# Altium PCB Main.PcbDoc (part 1 of 2)
Units mm, origin at the board's own origin, x right, y up, seen from the top; angles counter-clockwise.
Board outline 184.78 x 184.78 mm, 2 copper layers (Top Layer, Bottom Layer); 86 components, 58 nets, 400 pads, 352 vias.
Unrouted connection lines stored in the file: 51.
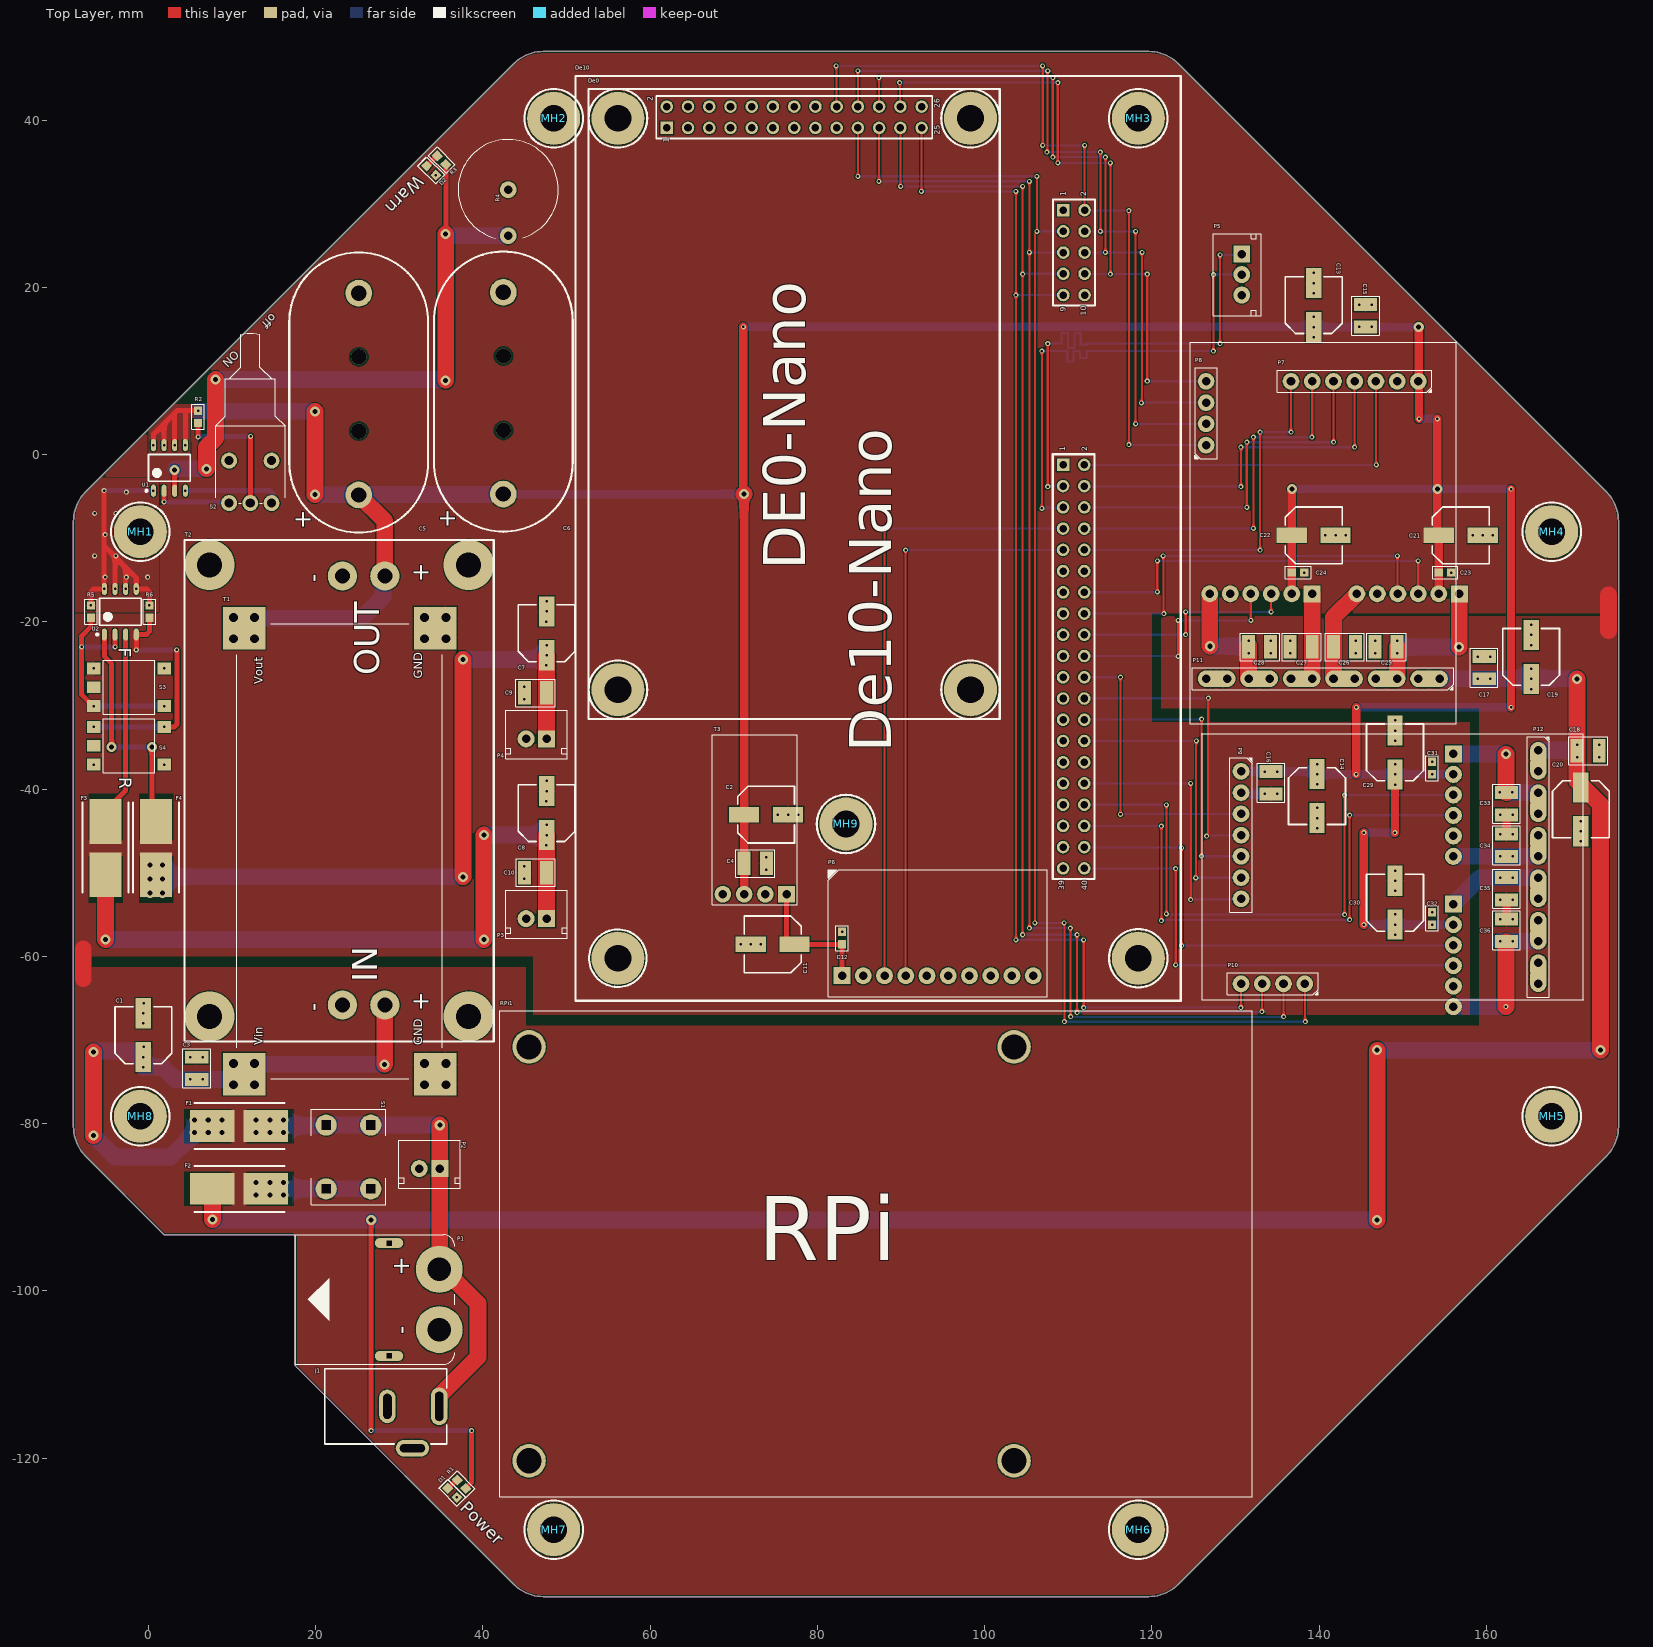
[diagram p0: Top Layer view]
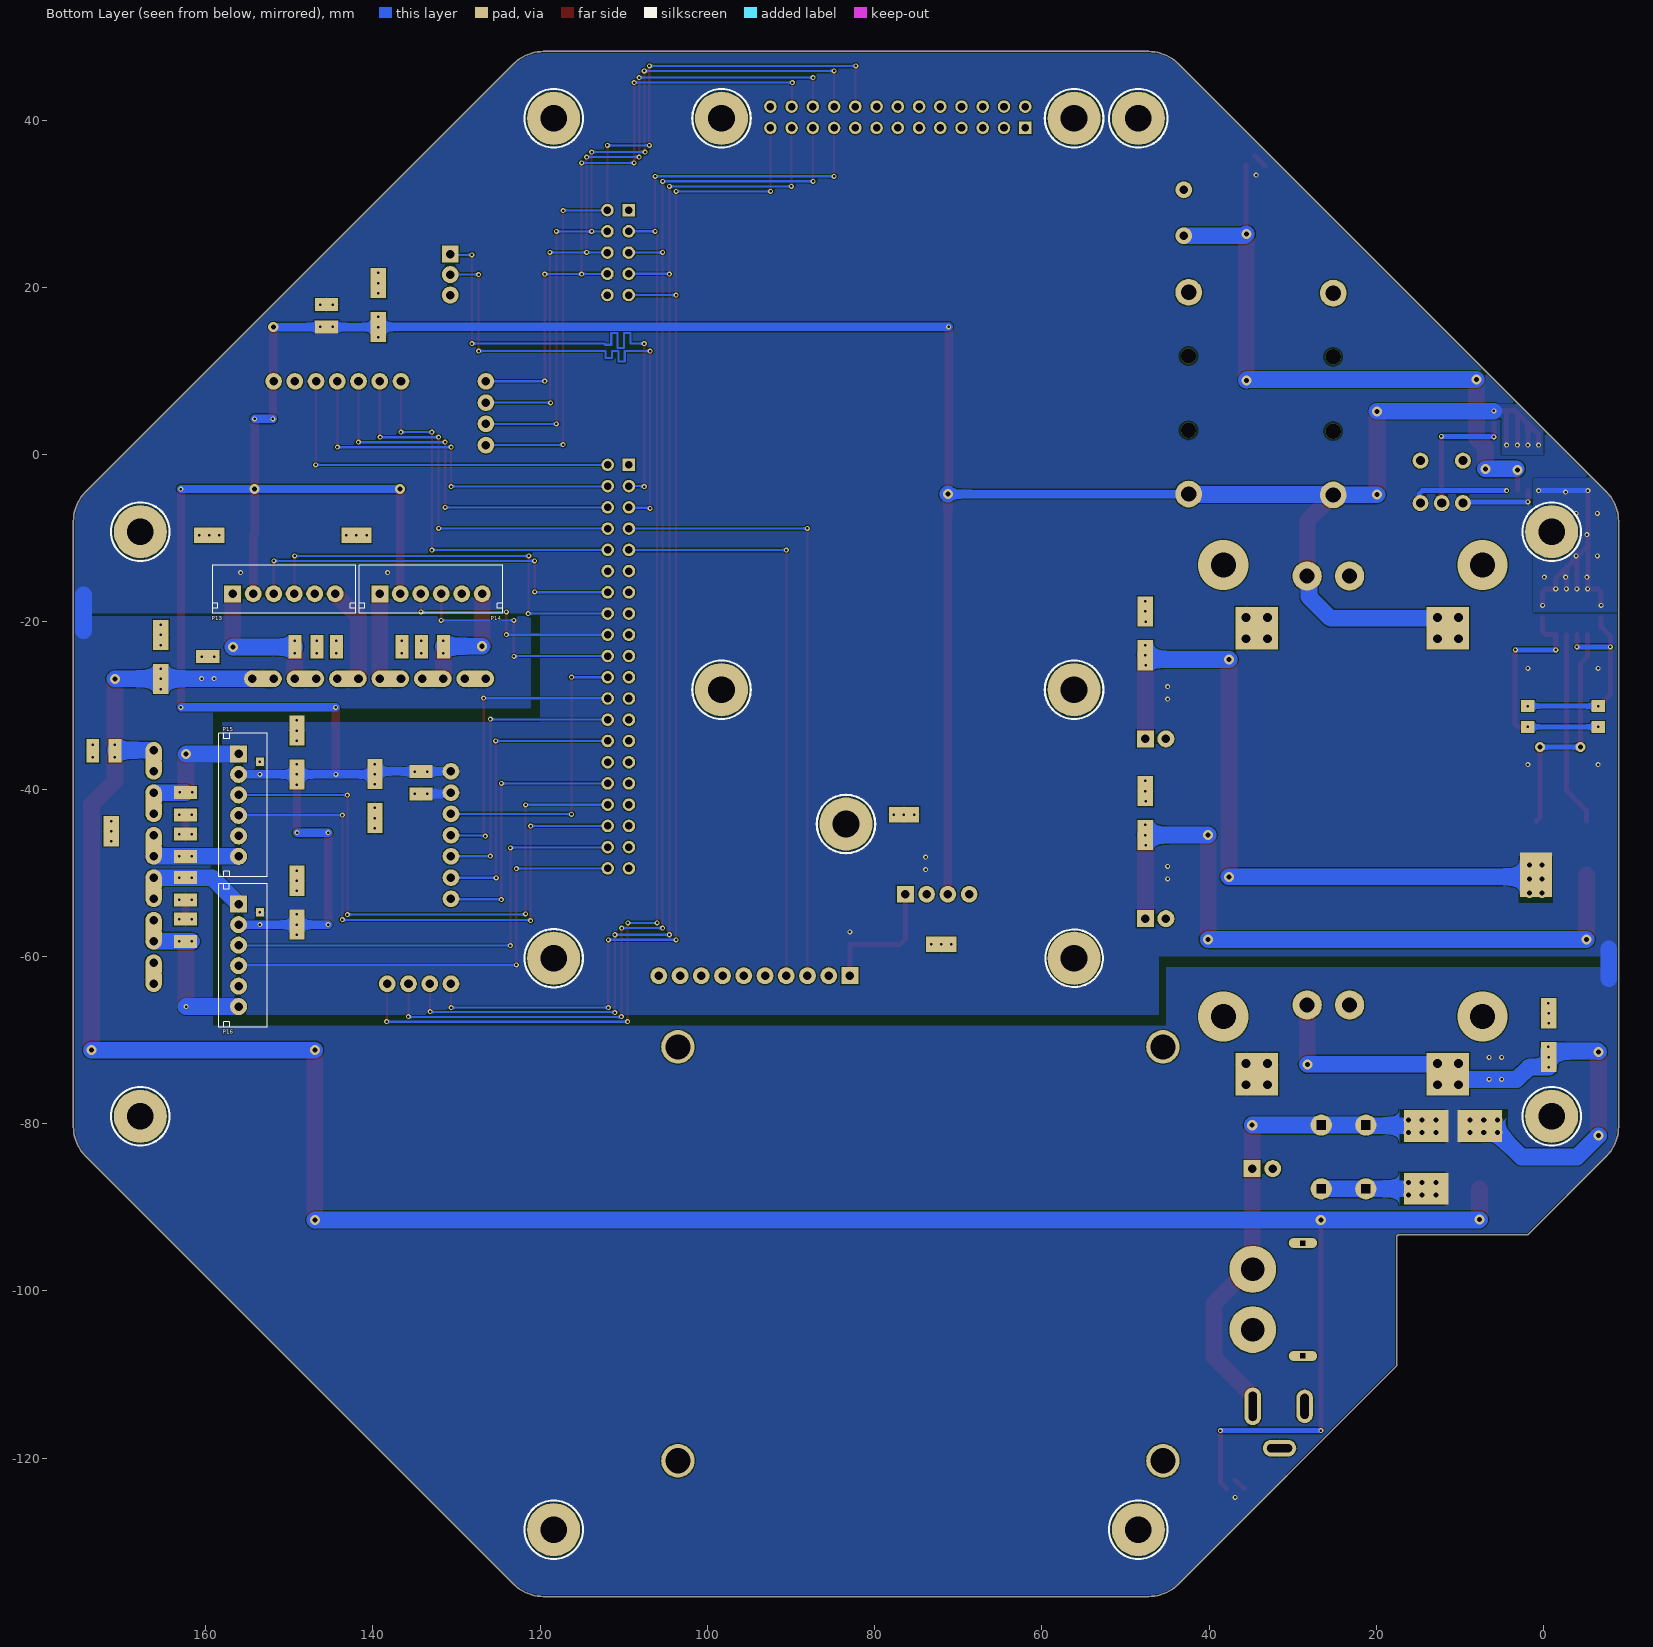
[diagram p1: Bottom Layer view, seen from below]
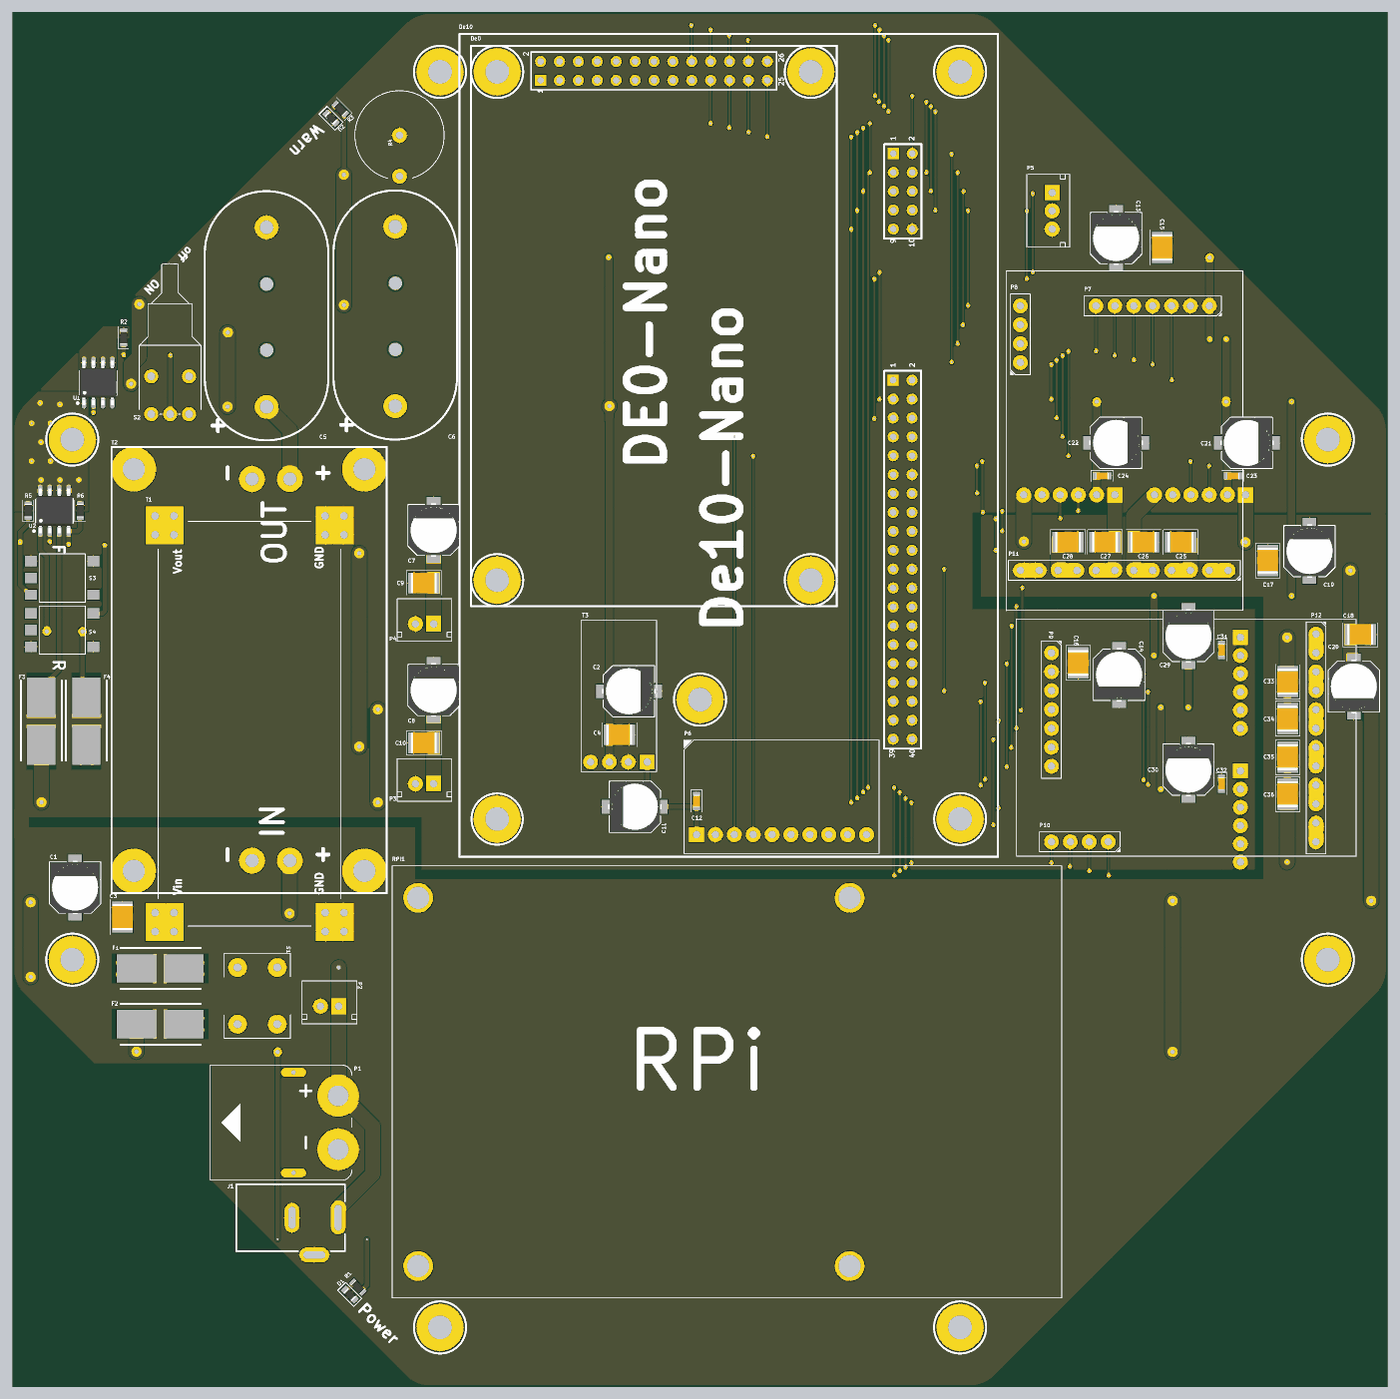
[diagram p2: 3D render of the assembled board from above, using the file's embedded part models]

## Layer stack, top to bottom
Top Solder: solder mask 0.0102, Solder Resist, Dk 3.5
Top Layer: signal copper 0.0356
Dielectric 1: dielectric 0.32, FR-4, Dk 4.8
Bottom Layer: signal copper 0.0356
Bottom Solder: solder mask 0.0102, Solder Resist, Dk 3.5

## Board outline
1.867,-93.289 17.242,-93.289 cw(c17.242,-93.614) 17.567,-93.614 17.567,-108.995 43.676,-135.104 ccw(c47.212,-131.569) 47.212,-136.569 119.607,-136.569 ccw(c119.607,-131.569) 123.142,-135.104 174.333,-83.914 ccw(c170.797,-80.378) 175.797,-80.378 175.797,-7.983 ccw(c170.797,-7.983) 174.333,-4.448 123.142,46.743 ccw(c119.607,43.207) 119.607,48.207 47.212,48.207 ccw(c47.212,43.207) 43.676,46.743 -7.514,-4.448 ccw(c-3.979,-7.983) -8.979,-7.983 -8.979,-80.378 ccw(c-3.979,-80.378) -7.514,-83.914

## Design rules (kind name [scope] priority, off if disabled: settings)
BoardOutlineClearance [All] p1: gap=0.2 ignorepadtopadclearanceinfootprint=FALSE
Clearance [All] p1: gap=0.127 ignorepadtopadclearanceinfootprint=FALSE except(0.25: Arc-Hole Track-Hole SMDPad-Hole THPad-Hole Via-Hole Fill-Hole Poly-Hole Region-Hole Text-Hole)
ComponentClearance [All] p1 off: gap=0.127 collisioncheckmode=3 verticalgap=0.127 showdistances=TRUE
DiffPairsRouting [All] p1: maxlimit=0.254 minlimit=0.127 mostfreqgap=0.127 toplayer_minwidth=0.127 toplayer_maxwidth=25.4 toplayer_prefwidth=0.127 bottomlayer_minwidth=0.127 bottomlayer_maxwidth=25.4 bottomlayer_prefwidth=0.127 maxuncoupledlength=12.7
Height [All] p1: minheight=0 maxheight=1816.048 prefheight=12.7
HoleSize [All] p1: absolutevalues=TRUE maxlimit=6.3 minlimit=0.3 maxpercent=80.000 minpercent=20.000
HoleToHoleClearance [All] p1: gap=0.25 allowstackedmicrovias=FALSE
Length "Schematic Length Constraint" [InNet('UART_RX')] p1: maxlimit=61 minlimit=60
Length [InNetClass('UART')] p2: maxlimit=60.1 minlimit=60
MinimumAnnularRing [All] p1: minimumring=0.076
MinimumSolderMaskSliver [All] p1: minsoldermaskwidth=0
PlaneClearance [All] p1: clearance=0.127
PlaneConnect PlaneConnectPowerPads [InPadClass('PowerPads')] p1: planeconnectstyle=Direct reliefexpansion=0.508 reliefentries=4 reliefconductorwidth=0.254 reliefairgap=0.254
PlaneConnect [All] p2: pad.planeconnectstyle=Relief pad.reliefexpansion=0.3 pad.reliefentries=4 pad.reliefconductorwidth=0.127 pad.reliefairgap=0.127 via.planeconnectstyle=Direct via.reliefexpansion=0.3 via.reliefentries=4 via.reliefconductorwidth=0.127 via.reliefairgap=0.127
PolygonConnect PolygonConnectPowerPads [All vs (InPadClass('PowerPads'))] p1: connectstyle=Direct reliefconductorwidth=0.254 reliefentries=4 polygonreliefangle="90 Angle" airgapwidth=0.254
PolygonConnect [All] p2: thpad.connectstyle=Relief thpad.reliefconductorwidth=0.127 thpad.reliefentries=4 thpad.polygonreliefangle="90 Angle" thpad.airgapwidth=0.127 smdpad.connectstyle=Relief smdpad.reliefconductorwidth=0.127 smdpad.reliefentries=4 smdpad.polygonreliefangle="90 Angle" smdpad.airgapwidth=0.127 via.connectstyle=Direct via.reliefconductorwidth=0.127 via.reliefentries=4 via.polygonreliefangle="90 Angle" via.airgapwidth=0.127
RoutingVias [All] p1: holewidth=0.3 width=0.6 viastyle="Through Hole" minholewidth=0.3 minwidth=0.6 maxholewidth=0.6 maxwidth=6.6
SilkToSilkClearance [All] p1: silktosilkclearance=0
SilkToSolderMaskClearance [IsPad] p1 off: minsilkscreentomaskgap=0.127 clearancetoexposedcopper=TRUE
SolderMaskExpansion [All] p1: expansion=0.075 istentingtop=FALSE
Width [All] p1: maxlimit=25.4 minlimit=0.127 preferedwidth=0.127 minimp=50.000000 maximp=50.000000 favimp=50.000000
20 further rules are at their usual default settings.

## Classes and differential pairs
net class UART: UART_RX UART_TX
component class Power: C1 C2 C3 C4 C5 C6 C7 C8 C9 C10 D1 D2 F1 F2 F3 F4 J1 MH1 MH2 MH3 MH4 MH5 MH6 MH7 MH8 MH9 P1 P2 P3 P4 R1 R2 R3 R4 R5 R6 S1 S2 S3 S4 T1 T2 T3 U1 U2
component class Motor: C13 C14 C15 C16 C17 C18 C19 C20 C21 C22 C23 C24 C25 C26 C27 C28 C29 C30 C31 C32 C33 C34 C35 C36 P7 P8 P9 P10 P11 P12 P13 P14 P15 P16
component class IOandCommunication: C11 C12 De0 De10 P5 P6 RPi1

## Components (designator, comment, footprint, x,y, rotation, side; value= is the part's Value field where it differs from the comment)
C1 "220uF" VZT221M1ETR-0607 -0.603,-69.434 r90 top
C2 "220uF" VZT221M1ETR-0607 73.85,-43.05 r0 top
C3 "0.1uF" 1210B104K500NT 5.765,-73.4 r270 top
C4 "0.1uF" 1210B104K500NT 72.55,-48.892 r180 top
C5 "10F" SUPPYCAP-DIP_L33.0_W16.5 25.135,-1.025 r90 top
C6 "10F" SUPPYCAP-DIP_L33.0_W16.5 42.435,-0.925 r90 top
C7 "220uF" VZT221M1ETR-0607 47.6,-21.375 r90 top
C8 "220uF" VZT221M1ETR-0607 47.6,-42.875 r90 top
C9 "0.1uF" 1210B104K500NT 46.275,-28.5 r0 top
C10 "0.1uF" 1210B104K500NT 46.275,-50 r0 top
C11 "220uF" VZT221M1ETR-0607 74.64,-58.575 r180 top
C12 "0.1uF" CL10B104KA8NNNC 82.935,-57.825 r270 top
C13 "220uF" VZT221M1ETR-0607 139.335,17.875 r90 top
C14 "220uF" VZT221M1ETR-0607 139.735,-40.85 r270 top
C15 "0.1uF" 1210B104K500NT 145.535,16.6 r270 top
C16 "0.1uF" 1210B104K500NT 134.235,-39.25 r90 top
C17 "0.1uF" 1210B104K500NT 159.715,-25.485 r270 top
C18 "0.1uF" 1210B104K500NT 172.16,-35.425 r180 top
C19 "220uF" VZT221M1ETR-0607 165.335,-24.2 r90 top
C20 "220uF" VZT221M1ETR-0607 171.287,-42.423 r270 top
C21 "220uF" VZT221M1ETR-0607 156.924,-9.665 r0 top
C22 "220uF" VZT221M1ETR-0607 139.34,-9.665 r0 top
C23 "0.1uF" CL10B104KA8NNNC 155.049,-14.11 r180 top
C24 "0.1uF" CL10B104KA8NNNC 137.465,-14.11 r180 top
C25 "0.1uF" 1210B104K500NT 148,-23 r180 top
C26 "0.1uF" 1210B104K500NT 143.03,-23 r180 top
C27 "0.1uF" 1210B104K500NT 137.84,-23 r180 top
C28 "0.1uF" 1210B104K500NT 132.87,-23 r180 top
C29 "220uF" VZT221M1ETR-0607 149.062,-35.628 r90 top
C30 "220uF" VZT221M1ETR-0607 149.062,-53.593 r90 top
C31 "0.1uF" CL10B104KA8NNNC 153.507,-37.503 r270 top
C32 "0.1uF" CL10B104KA8NNNC 153.507,-55.468 r270 top
C33 "0.1uF" 1210B104K500NT 162.397,-41.758 r270 top
C34 "0.1uF" 1210B104K500NT 162.397,-46.728 r270 top
C35 "0.1uF" 1210B104K500NT 162.397,-51.918 r270 top
C36 "0.1uF" 1210B104K500NT 162.397,-56.888 r270 top
D1 "LED(G)" BL-HG036D-AV-TRB 35.802,-122.572 r315 top
D2 "LED(G)" BL-HG036D-AV-TRB 33.278,35.559 r315 top
De0 "DE0-Nano" DE0-NANO 93.726,40.334 r90 top locked
De10 "De10-Nano" DE10-NANO 110.664,19.077 r90 top locked
F1 "5A Fuse Holder" "SMD FUSES HOLDER" 10.827,-80.314 r180 top
F2 "10A Fuse Holder" "SMD FUSES HOLDER" 10.827,-87.807 r180 top
F3 "4A Fuse Holder" "SMD FUSES HOLDER" -5.135,-47.075 r270 top
F4 "4A Fuse Holder" "SMD FUSES HOLDER" 0.915,-47.075 r270 top
J1 "DC-005-T25" DC-005-T25 26.66,-114.73 r0 top
MH1 "M3 Hole" "M3 HOLE" -0.979,-9.226 r0 top locked
MH2 "M3 Hole" "M3 HOLE" 48.455,40.207 r0 top
MH3 "M3 Hole" "M3 HOLE" 118.364,40.207 r0 top
MH4 "M3 Hole" "M3 HOLE" 167.797,-9.226 r0 top
MH5 "M3 Hole" "M3 HOLE" 167.797,-79.135 r0 top
MH6 "M3 Hole" "M3 HOLE" 118.364,-128.569 r0 top
MH7 "M3 Hole" "M3 HOLE" 48.455,-128.569 r0 top
MH8 "M3 Hole" "M3 HOLE" -0.979,-79.135 r0 top
MH9 "M3 Hole" "M3 HOLE" 83.409,-44.181 r0 top
P1 "Header 2" XT60PW-F 31.767,-101.039 r90 top
P2 "Header 2" B2B-XH-A(LF)(SN) 37.28,-81.994 r180 top
P3 "Header 2" B2B-XH-A(LF)(SN) 50.05,-52.1 r180 top
P4 "Header 2" B2B-XH-A(LF)(SN) 50.05,-30.6 r180 top
P5 "Header 3" B3B-XH-A(LF)(SN) 131.61,25.075 r270 top
P6 "MPU9250" MPU9250 81.265,-49.625 r90 top
P7 "Header 7" KH-2.54FH-1X7P-H8.5 132.465,8.75 r180 top
P8 "Header 4" KH-2.54FH-1X4P-H8.5 126.465,10.37 r90 top
P9 "Header 7" KH-2.54FH-1X7P-H8.5 130.647,-57.293 r270 top
P10 "Header 4" KH-2.54FH-1X4P-H8.5 129.027,-63.293 r180 top
P11 "Header 12" "KH-2.54FH-1X12P-H8.5 (PAD LINKED)" 154.405,-26.81 r180 top
P12 "Header 12" "KH-2.54FH-1X12P-H8.5 (PAD LINKED)" 166.207,-35.353 r270 top
P13 "Header 6" B6B-XH-A(LF)(SN) 156.749,-16.65 r180 bottom
P14 "Header 6" B6B-XH-A(LF)(SN) 139.165,-16.65 r180 bottom
P15 "Header 6" B6B-XH-A(LF)(SN) 156.047,-35.803 r270 bottom
P16 "Header 6" B6B-XH-A(LF)(SN) 156.047,-53.768 r270 bottom
R1 "150k" RS-03K1503FT 37.428,-123.138 r315 top
R2 "1k" RS-03K1503FT 5.935,4.5 r90 top
R3 "150k" RS-03K1503FT 35.045,35.205 r315 top
R4 "12" MOF3WS-12Ω±5%T 43.015,31.675 r270 top
R5 "1k" RS-03K1503FT -6.9,-18.775 r90 top
R6 "1k" RS-03K1503FT 0.1,-18.775 r90 top
RPi1 "Rasbperry PI 4" "RASPBERRY PI 4" 74.515,-95.575 r180 top locked
S1 "Motor EMS" JNQ032 26.575,-87.807 r270 top
S2 "Digital EMS" ST-0-102-C03-N003-RS 12.175,9.045 r270 top
S3 "FPGA_Re" SKHMQLE010 -2.335,-27.825 r180 top
S4 "RPi_Re" SKHMQKE010 -2.335,-34.825 r180 top
T1 "XL4015 Module" "XL4015 VOLTAGE REGULATOR MODULE" 12.695,-72.825 r90 top locked
T2 "XL4016 Module" "XH-M401 VOLTAGE REGULATOR MODULE" 26.365,9.375 r90 top locked
T3 "3P3 Voltage regulator" "SMALL VOLTAGE REGULATOR MODULE" 77.575,-53.845 r180 top
U1 "HSM3214" HSM3214 2.5,-1.6 r90 top
U2 "HSM3214" HSM3214 -3.37,-18.8 r90 top

## Footprints (in the part's own frame and the unit in brackets; to place one, negate y for a bottom-side part, rotate by r counter-clockwise, add the part's x,y. Pads: shape width x height; smd on the part's side, far side on the other; paste and mask are expansions set on the pad)
1210B104K500NT [mm] "50V 100nF X7R ±10% 1210  Multilayer Ceramic Capacitors MLCC - SMD/SMT ROHS"
  rect 1.55x2.8 smd: 1(-1.325,0) 2(1.325,0)
  silkscreen extent -2.35,-1.65 2.35,1.65, body extent -1.75,-1.4 1.75,1.4, height 2.8
B2B-XH-A(LF)(SN) [mil] "1x2P XH Header, Top Vesion"
  rect 80x80 hole 40: 1(96.46,133.86)
  round 80 hole 40: 2(192.91,133.86)
  silkscreen extent 0,0 289,226
B3B-XH-A(LF)(SN) [mil] "1x3P XH Header, Top Vesion"
  rect 80x80 hole 40: 1(43.31,-34.45)
  round 80 hole 40: 2(139.76,-34.45) 3(236.22,-34.45)
  silkscreen extent -53,-168 333,58
B6B-XH-A(LF)(SN) [mil] "1x6P XH 1 2.5mm 6 Brass Plugin,P=2.5mm  Wire To Board / Wire To Wire Connector ROHS"
  rect 80x80 hole 40: 1(0,0)
  round 80 hole 40: 2(96.46,0) 3(192.91,0) 4(289.37,0) 5(385.83,0) 6(482.28,0)
  silkscreen extent -96,-93 579,134
BL-HG036D-AV-TRB [mm] "0603 SMD LED(G)"
  rect 0.95x0.95 smd: 1(0.725,-0.75) 2(2.275,-0.75)
  silkscreen extent -0.06,-1.5 3,0, body extent 0.65,-1.2 2.35,-0.3, height 0.9
CL10B104KA8NNNC [mm] "0603 25V 100nF MLCC"
  rect 1x0.95 smd: 1(-0.75,0) 2(0.75,0)
  silkscreen extent -1.5,-0.75 1.5,0.75, body extent -0.85,-0.45 0.85,0.45, height 0.55
DC-005-T25 [mm] "30V 3A 2.5mm Power Connector"
  oval 2x4.5 hole 1 slot 3.5 at 90 deg: 1(8.105,0.905)
  oval 2x4 hole 1 slot 3 at 90 deg: 2(1.905,0.905)
  oval 4x2 hole 1 slot 3 at 0 deg: 3(4.905,-4.095)
  silkscreen extent -5.6,-3.6 9.01,5.41
DE0-NANO [mm]
  round 6.35 hole 3.2: 0(-68.453,-4.572) 0(-68.453,37.592) 0(-0.127,-4.572) 0(-0.127,37.592)
  rect 1.5x1.5 hole 0.9: 1(-1.27,31.75)
  round 1.5 hole 0.9: 2(1.27,31.75) 3(-1.27,29.21) 4(1.27,29.21) 5(-1.27,26.67) 6(1.27,26.67) 7(-1.27,24.13) 8(1.27,24.13) 9(-1.27,21.59) 10(1.27,21.59) 11(-1.27,19.05) 12(1.27,19.05) 13(-1.27,16.51) 14(1.27,16.51) 15(-1.27,13.97) 16(1.27,13.97) 17(-1.27,11.43) 18(1.27,11.43) 19(-1.27,8.89) 20(1.27,8.89) 21(-1.27,6.35) 22(1.27,6.35) 23(-1.27,3.81) 24(1.27,3.81) 25(-1.27,1.27) 26(1.27,1.27)
  silkscreen extent -71.96,-8.08 3.38,41.1
DE10-NANO [mm]
  round 6.35 hole 3.2: 0(-79.31,-7.7) 0(-79.31,54.53) 0(21.13,54.53) 0(21.13,-7.7)
  rect 1.5x1.5 hole 0.9: 1(10.16,1.27) 11(-20.31,1.3)
  round 1.5 hole 0.9: 2(10.16,-1.27) 3(7.62,1.27) 4(7.62,-1.27) 5(5.08,1.27) 6(5.08,-1.27) 7(2.54,1.27) 8(2.54,-1.27) 9(0,1.27) 10(0,-1.27) 12(-20.31,-1.24) 13(-22.85,1.3) 14(-22.85,-1.24) 15(-25.39,1.3) 16(-25.39,-1.24) 17(-27.93,1.3) 18(-27.93,-1.24) 19(-30.47,1.3) 20(-30.47,-1.24) 21(-33.01,1.3) 22(-33.01,-1.24) 23(-35.55,1.3) 24(-35.55,-1.24) 25(-38.09,1.3) 26(-38.09,-1.24) 27(-40.63,1.3) 28(-40.63,-1.24) 29(-43.17,1.3) 30(-43.17,-1.24) 31(-45.71,1.3) 32(-45.71,-1.24) 33(-48.25,1.3) 34(-48.25,-1.24) 35(-50.79,1.3) 36(-50.79,-1.24) 37(-53.33,1.3) 38(-53.33,-1.24) 39(-55.87,1.3) 40(-55.87,-1.24) 41(-58.41,1.3) 42(-58.41,-1.24) 43(-60.95,1.3) 44(-60.95,-1.24) 45(-63.49,1.3) 46(-63.49,-1.24) 47(-66.03,1.3) 48(-66.03,-1.24) 49(-68.57,1.3) 50(-68.57,-1.24)
  silkscreen extent -84.39,-12.78 26.21,59.61
HSM3214 [mm] "30V 10A 12mΩ@10V,8A 1.5W 2.5V@250μA 2 N-Channel SOP-8  MOSFETs ROHS"
  oval 1.45x0.6 smd: 1(-2.725,1.905) 2(-2.725,0.635) 3(-2.725,-0.635) 4(-2.725,-1.905) 5(2.725,-1.905) 6(2.725,-0.635) 7(2.725,0.635) 8(2.725,1.905)
  silkscreen extent -2.85,-2.5 1.6,2.88, body extent -3,-2.5 3,2.5, height 1.75
JNQ032 [mm] "30A 4.8mm Short Connection"
  round 2.54 hole 1.1 square: 1(-7.62,0) 1(-7.62,-5.334) 2(0,0) 2(0,-5.334)
  silkscreen extent -9.53,-7.11 1.91,1.78, body extent -9.14,-6.86 1.52,1.52, height 8.8
KH-2.54FH-1X4P-H8.5 [mm] "1x4P Female Headers"
  round 2 hole 1.02: 1(-9.24,0) 2(-6.7,0) 3(-4.16,0) 4(-1.62,0)
  silkscreen extent -10.86,-1.33 0,1.33, body extent -10.89,-1.34 0,1.32, height 8.65
KH-2.54FH-1X7P-H8.5 [mm] "1x7P Female Headers"
  round 2 hole 1.02: 1(-19.4,0) 2(-16.86,0) 3(-14.32,0) 4(-11.78,0) 5(-9.24,0) 6(-6.7,0) 7(-4.16,0)
  silkscreen extent -21.02,-1.33 -2.54,1.33, body extent -21.05,-1.34 -2.54,1.32, height 8.65
"KH-2.54FH-1X12P-H8.5 (PAD LINKED)" [mm] "Two Pad Linked, 1x12P Female Headers"
  oval 3x2 hole 1.02 copper offset 0.51,0: 1(0,0) 3(5.08,0) 5(10.16,0) 7(15.24,0) 9(20.32,0) 11(25.4,0)
  oval 3x2 hole 1.02 copper offset -0.51,0: 2(2.54,0) 4(7.62,0) 6(12.7,0) 8(17.78,0) 10(22.86,0) 12(27.94,0)
  silkscreen extent -1.62,-1.33 29.56,1.33, body extent -1.65,-1.34 29.56,1.33, height 8.65
"M3 HOLE" [mm] "M3 Hole"
  round 6.35 hole 3.2: 1(0,0)
  silkscreen extent -3.5,-3.5 3.5,3.5
MOF3WS-12Ω±5%T [mm] "12Ω 3W Resistor"
  round 2 hole 1: 1(0,0) 2(5.5,0)
  silkscreen extent -6,-6 5.79,6
MPU9250 [mil] "MPU9250"
  rect 80x80 hole 40: 1(-500,-65.75)
  round 80 hole 40: 2(-500,-165.75) 3(-500,-265.75) 4(-500,-365.75) 5(-500,-465.75) 6(-500,-565.75) 7(-500,-665.75) 8(-500,-765.75) 9(-500,-865.75) 10(-500,-965.75)
  silkscreen extent -600,-1031 0,0, body extent -560,-1031 -440,0, height 358
"RASPBERRY PI 4" [mm]
  round 4 hole 3: 1(-29,24.75) 1(-29,-24.75) 1(29,24.75) 1(29,-24.75)
  silkscreen extent -57.5,-29.05 32.5,29.05
RS-03K1503FT [mm] "0603 150k 1/10w Resistor"
  rect 1x0.95 smd: 1(-0.725,0) 2(0.725,0)
  silkscreen extent -1.5,-0.75 1.5,0.75, body extent -0.87,-0.47 0.87,0.47, height 0.5
SKHMQKE010 [mm] "6.2mm 3.1mm Round Button 50mA Brick nogging 6.5mm SPST 12V SMD  Tactile Switches ROHS"
  rect 1.6x1.4 smd: 1(-4.2,2.25) 1(4.2,2.25) 2(-4.2,-2.25) 2(4.2,-2.25) 3(4.2,0)
  silkscreen extent -3.1,-3.25 3.1,3.25, body extent -3.1,-3.25 3.1,3.25, height 3.1
SKHMQLE010 [mm] "6.2mm 3.1mm Round Button 50mA Brick nogging 6.5mm SPST 12V SMD  Tactile Switches ROHS"
  rect 1.6x1.4 smd: 1(-4.2,2.25) 1(4.2,2.25) 2(-4.2,-2.25) 2(4.2,-2.25) 3(4.2,0)
  silkscreen extent -3.1,-3.25 3.1,3.25, body extent -3.1,-3.25 3.1,3.25, height 3.1
"SMALL VOLTAGE REGULATOR MODULE" [mm] "3A DC-DC Non-isolated voltage regulator module"
  round 2 hole 1.02: 1(6.35,-1.27) 2(3.81,-1.27) 4(8.89,-1.27)
  rect 2x2 hole 1.02: 3(1.27,-1.27)
  silkscreen extent 0,-20.32 10.16,0, body extent -0.35,-2.61 10.51,0.04, height 8.65
"SMD FUSES HOLDER" [mil] "SMD 1808 Fuse Holder"
  rect 210x150 smd: 1(-125.5,0) 2(125.5,0)
  silkscreen extent -214,-108 209,108, body extent -214,-108 209,108, height 150
ST-0-102-C03-N003-RS [mm] "SW-SPST"
  round 1.9 hole 1.1: 1(14.85,2.54) 2(14.85,0) 3(14.85,-2.54) 4(9.77,-2.54) 4(9.77,2.54)
  silkscreen extent -5.4,-4.15 14.85,4.15
SUPPYCAP-DIP_L33.0_W16.5 [mm] "478-11288-ND * 2"
  round 3.2 hole 1.83: 1(-3.802,0) 2(20.328,0)
  silkscreen extent -8.3,-8.3 25.2,8.3
VZT221M1ETR-0607 [mm] "SMD 6.3x7.7mm 220uF 25V Capacitor"
  rect 3.6x1.85 smd: 1(-2.625,0) 2(2.625,0)
  silkscreen extent -3.4,-3.4 3.4,3.4, body extent -3.6,-3.4 3.6,3.4, height 8
"XH-M401 VOLTAGE REGULATOR MODULE" [mm] "8A DC-DC Non-isolated voltage regulator module"
  round 3.5 hole 1.8: 1(-75.2,-1.9) 2(-75.2,3.18) 3(-23.9,-1.9) 4(-23.9,3.18)
  silkscreen extent -79.58,-14.92 -19.58,22.08
"XL4015 VOLTAGE REGULATOR MODULE" [mm] "5A DC-DC Non-isolated voltage regulator module"
  rect 2.74x2.74 hole 1.06 copper offset 0.1,0.1: 1(-2.54,0) 2(-2.54,-22.86) 3(50.8,0) 4(50.8,-22.86)
  rect 2.74x2.74 hole 1.06 copper offset 0.1,-0.1: 1(-2.54,2.54) 2(-2.54,-20.32) 3(50.8,2.54) 4(50.8,-20.32)
  rect 2.74x2.74 hole 1.06 copper offset -0.1,-0.1: 1(0,2.54) 2(0,-20.32) 3(53.34,2.54) 4(53.34,-20.32)
  rect 2.74x2.74 hole 1.06 copper offset -0.1,0.1: 1(0,0) 2(0,-22.86) 3(53.34,0) 4(53.34,-22.86)
  silkscreen extent -1.8,-22.46 52.6,2.14, body extent -3.81,-24.13 54.61,3.81, height 8.8
XT60PW-F [mm] "500V 45A XT Connector"
  round 5.6 hole 2.8: 1(3.6,-3) 2(-3.6,-3)
  oval 1.2x3.4 hole 0.6 square: 3(-6.75,3) 3(6.75,3)
  silkscreen extent -7.75,-4.85 7.75,14.2, body extent -7.75,-4.85 7.75,14.2, height 8.4

## Part data
C1 C2 C7 C8 C11 C13 C14 C19 C20 C21 C22 C29 C30: library part "Cap Pol1", "-45℃~+105℃ 2000hrs@105℃ 220uF 7.7mm 25V 6.3mm ±20% SMD,6.3x7.7mm  Aluminum Electrolytic Capacitors - SMD ROHS", LatestRevisionDate=17-Jul-2002, LatestRevisionNote="Re-released for DXP Platform.", PackageDescription="Polarized Capacitor (Radial); 2 Leads", PackageReference=RB7.6-15, Published=8-Jun-2000, Publisher="Altium Limited"
C3 C4 C9 C10 C15 C16 C17 C18 C25 C26 C27 C28 C33 C34 C35 C36: library part "Cap Semi", "50V 100nF X7R ±10% 1210  Multilayer Ceramic Capacitors MLCC - SMD/SMT ROHS", LatestRevisionDate=29-May-2009, LatestRevisionNote="IPC-7351 Footprint Added.", PackageDescription="Chip Capacitor", PackageReference=C1206, Published=8-Jun-2000, Publisher="Altium Limited"
C5 C6: library part "Cap Pol1", "CAPACITOR 10F -10% +30% 5.5V T/H", LatestRevisionDate=17-Jul-2002, LatestRevisionNote="Re-released for DXP Platform.", PackageDescription="Polarized Capacitor (Radial); 2 Leads", PackageReference=RB7.6-15, Published=8-Jun-2000, Publisher="Altium Limited"
C12 C23 C24 C31 C32: library part "Cap Semi", "25V 100nF X7R ±10% 0603  Multilayer Ceramic Capacitors MLCC - SMD/SMT ROHS", LatestRevisionDate=29-May-2009, LatestRevisionNote="IPC-7351 Footprint Added.", PackageDescription="Chip Capacitor", PackageReference=C1206, Published=8-Jun-2000, Publisher="Altium Limited"
D1 D2: library part LED0, "Green-yellow 0603 Light Emitting Diodes (LED) RoHS", LatestRevisionDate=08-Jul-2005, LatestRevisionNote="Mech Layer 1 removed.", PackageDescription="LED; 2 Leads", PackageReference=LED-0, Published=8-Jun-2000, Publisher="Altium Limited"
De0: library part De0-Nano
F1: library part "Fuse 1", "01550900M (Fuse Holder) / SMD,9.73x5.03mm Fuse Holders ROHS / ----- / 0451005.MRL (Fuse) / FastBlow 50A SMD Fuse 5A 5.566 12.5mΩ SMD  Fuses ROHS", LatestRevisionDate=17-Jul-2002, LatestRevisionNote="Re-released for DXP Platform.", PackageDescription="Thru-Hole; 2 Leads", PackageReference=PIN-W2/E2.8, Published=8-Jun-2000, Publisher="Altium Limited"
F2: library part "Fuse 1", "01550900M (Fuse Holder) / SMD,9.73x5.03mm Fuse Holders ROHS / ----- / 0451010.MRL (Fuse) / FastBlow 50A SMD Fuse 10A 26.46 5.6mΩ SMD  Fuses ROHS", LatestRevisionDate=17-Jul-2002, LatestRevisionNote="Re-released for DXP Platform.", PackageDescription="Thru-Hole; 2 Leads", PackageReference=PIN-W2/E2.8, Published=8-Jun-2000, Publisher="Altium Limited"
F3 F4: library part "Fuse 1", "01550900M (Fuse Holder) / SMD,9.73x5.03mm Fuse Holders ROHS / ----- / 0451004.MRL (Fuse) / FastBlow 50A SMD Fuse 4A 3.152 16mΩ SMD  Fuses ROHS", LatestRevisionDate=17-Jul-2002, LatestRevisionNote="Re-released for DXP Platform.", PackageDescription="Thru-Hole; 2 Leads", PackageReference=PIN-W2/E2.8, Published=8-Jun-2000, Publisher="Altium Limited"
J1: library part PWR2.5, "Shrouded DC Power Receptacle -10℃~+60℃ 2.5mm 6.3mm 3A 30V Plugin AC/DC Power Connectors ROHS", ComponentLink1Description="Manufacturer Link", ComponentLink1URL=http://domino.kycon.com/internet/Products.html, DatasheetDocument=09-May-2002, Published=17-Dec-2003, Publisher="Altium Limited"
MH1 MH2 MH3 MH4 MH5 MH6 MH7 MH8 MH9: library part M3_Hole
P1: "XT60PW-F 500V 45A Through Hole Power Connectors ROHS", LatestRevisionDate=17-Jul-2002, LatestRevisionNote="Re-released for DXP Platform.", Publisher="Altium Limited"
P2 P3 P4: "1x2P XH 1 2.5mm 2 Brass Plugin,P=2.5mm  Wire To Board / Wire To Wire Connector ROHS", LatestRevisionDate=17-Jul-2002, LatestRevisionNote="Re-released for DXP Platform.", Publisher="Altium Limited"
P5: "1x3P XH 1 2.5mm 3 Brass Plugin,P=2.5mm  Wire To Board / Wire To Wire Connector ROHS", LatestRevisionDate=17-Jul-2002, LatestRevisionNote="Re-released for DXP Platform.", Publisher="Altium Limited"
P6: "9DOF, 3 Axis Gyro, Acceleration, Magmetic"
P7 P9: "3A Straight Square Pins 2.5mm 6mm -40℃~+105℃ 1 7 3mm 2.54mm Black 1x7P Plugin,P=2.54mm  Pin Headers ROHS", LatestRevisionDate=17-Jul-2002, LatestRevisionNote="Re-released for DXP Platform.", Publisher="Altium Limited"
P8 P10: "3A Straight Square Pins 2.5mm 6mm -40℃~+105℃ 1 4 3mm 2.54mm Black 1x4P Plugin,P=2.54mm  Pin Headers ROHS", LatestRevisionDate=17-Jul-2002, LatestRevisionNote="Re-released for DXP Platform.", Publisher="Altium Limited"
P11 P12: "3A Straight Square Pins 2.5mm 6mm -40℃~+105℃ 1 12 3mm 2.54mm Black 1x12P Plugin,P=2.54mm  Pin Headers ROHS", LatestRevisionDate=17-Jul-2002, LatestRevisionNote="Re-released for DXP Platform.", Publisher="Altium Limited"
P13 P14 P15 P16: "1x6P XH 1 2.5mm 6 Brass Plugin,P=2.5mm  Wire To Board / Wire To Wire Connector ROHS", LatestRevisionDate=17-Jul-2002, LatestRevisionNote="Re-released for DXP Platform.", Publisher="Altium Limited"
R1 R2 R3 R5 R6: library part Res1, "100mW 50V ±1% ±100ppm/℃ -55℃~+155℃ 150kΩ 0603  Chip Resistor - Surface Mount ROHS", LatestRevisionDate=17-Jul-2002, LatestRevisionNote="Re-released for DXP Platform.", PackageDescription="Axial Device, Thru-Hole; 2 Leads; 0.3 in Pin Spacing", PackageReference=AXIAL-0.3, Published=8-Jun-2000, Publisher="Altium Limited"
R4: library part Res1, "Metal Oxide Resistors 12Ω 3W ±700ppm/℃ ±5% Axial Leaded  Through Hole Resistors ROHS", LatestRevisionDate=17-Jul-2002, LatestRevisionNote="Re-released for DXP Platform.", PackageDescription="Axial Device, Thru-Hole; 2 Leads; 0.3 in Pin Spacing", PackageReference=AXIAL-0.3, Published=8-Jun-2000, Publisher="Altium Limited"
S1: library part SW-SPST, "JNQ032 (Header) / 30A Short Connection Quick connect terminal Plugin  Cold-pressed?Terminals ROHS / ----- / RT-S02-113-R42BR (Switch) / Through Hole Rocker Switches ROHS", LatestRevisionDate=17-Jul-2002, LatestRevisionNote="Re-released for DXP Platform.", PackageDescription="Switch; 2 Leads", PackageReference=SPST-2, Published=24-Mar-1999, Publisher="Altium Limited"
S2: library part SW-SPDT, "Cylindrical button handle 125V -25℃~85℃ SPDT PCPin 40000 3A Plugin  Toggle Switches ROHS", ComponentLink1Description="Manufacturer Link", ComponentLink1URL=http://www.apem.com, DatasheetVersion=05-Dec-2000, LatestRevisionDate=17-Dec-2003, LatestRevisionNote="Schematic revised, PCB Footprint replaced.", PackageDescription="Switch; 4 Leads", PackageReference=TL36WW15050, Published=24-Mar-1999, Publisher="Altium Limited"
S3 S4: library part SW-SPST, "6.2mm 3.1mm Round Button 50mA Brick nogging 6.5mm SPST 12V SMD  Tactile Switches ROHS", LatestRevisionDate=17-Jul-2002, LatestRevisionNote="Re-released for DXP Platform.", PackageDescription="Switch; 2 Leads", PackageReference=SPST-2, Published=24-Mar-1999, Publisher="Altium Limited"
T1: library part "Non-isolated Voltage regulator", "XL4015E1 (Module) / Step-down type TO-263-5  DC-DC Converters ROHS / ----- / A2541HWV-2x2P (Header) / 2.54mm 2.54mm Gold Brass Straight 2x2P 4 2 Plugin,P=2.54mm  Female Headers ROHS"
T2: library part "Non-isolated Voltage regulator", "NO Step-down type 1 Step-down 1.25V~36V 8V~40V 8A 180kHz TO-220-5  DC-DC Converters ROHS"
T3: library part "Non-isolated Voltage regulator", "3A Non-isolated Voltage Regulator", ComponentLink1Description=buy_link, ComponentLink1URL=https://www.ruten.com.tw/item/show?21817939184609
U1 U2: "30V 10A 12mΩ@10V,8A 1.5W 2.5V@250μA 2 N-Channel SOP-8  MOSFETs ROHS"

## Free pads (board coordinates)
  rect 1.6x1.4 smd far side: 1(-6.535,-32.575) 1(-6.535,-30.075) 1(1.865,-32.575) 1(1.865,-30.075)
  rect 3.81x5.334 smd far side: 1(0.915,-50.263)
  rect 5.334x3.81 smd far side: 1(7.639,-80.314) 1(14.015,-87.807) 1(14.015,-80.314)
  rect 1.55x2.8 smd far side: 1(131.545,-23) 1(134.195,-23) 1(136.515,-23) 1(144.355,-23) 1(146.675,-23) 1(149.325,-23) 1(170.835,-35.425) 1(173.485,-35.425)
  rect 2.8x1.55 smd far side: 1(134.235,-40.575) 1(134.235,-37.925) 1(159.715,-24.16) 1(162.397,-58.213) 1(162.397,-55.563) 1(162.397,-53.243) 1(162.397,-50.593) 1(162.397,-48.053) 1(162.397,-45.403) 1(162.397,-43.083) 1(162.397,-40.433) 2(145.535,15.275) 2(145.535,17.925)
  rect 1.85x3.6 smd far side: 1(139.735,-38.225) 1(149.062,-56.218) 2(-0.603,-72.059) 2(-0.603,-66.809) 2(47.6,-40.25) 2(47.6,-24) 2(47.6,-18.75) 2(139.335,20.5) 2(139.335,15.25) 2(139.735,-43.475) 2(149.062,-50.968) 2(149.062,-38.253) 2(149.062,-33.003) 2(165.335,-26.825) 2(165.335,-21.575) 2(171.287,-45.048)
  rect 1.85x3.6 smd far side mask+0.075: 2(47.6,-45.5)
  rect 3.6x1.85 smd far side: 2(72.015,-58.575) 2(76.475,-43.05) 2(141.965,-9.665) 2(159.549,-9.665)
  rect 0.95x1 smd far side: 2(153.507,-54.718) 2(153.507,-36.753)

## Via types
v1: diameter 0.6, hole 0.3, Top Layer to Bottom Layer, 287 vias
v2: diameter 1.2, hole 0.6, Top Layer to Bottom Layer, 54 vias
v3: diameter 1.83, hole 1.83, Top Layer to Bottom Layer, tented both sides, 4 vias
v4: diameter 6, hole 3, Top Layer to Bottom Layer, 4 vias
v5: diameter 0.6, hole 0.3, Top Layer to Bottom Layer, tented both sides, 2 vias
v6: diameter 1.27, hole 0.6, Top Layer to Bottom Layer, tented both sides, 1 vias

## Nets (pads, with @x,y where several pads share a name; then routed paths per layer and width w, separated by ;. In a path a pad name is that pad's centre, name@x,y a point inside that pad or via, vN(x,y) a via of type N, cw(c..) or ccw(c..) an arc to the next point about the centre after c; other vN are vias at no path point)
A_12V: C17.2 C18.2 C19.1 C20.1 F2.2 P11.1 P11.2 P12.1 P12.2 pad.1@170.835,-35.425 pad.2@165.335,-26.825 R1.2 | length 307.2
  Top Layer w0.6: v5(26.635,-116.725) v2(26.635,-91.525) ; R1.2@37.923,-123.633 37.923,-123.621 38.635,-122.909 v5(38.635,-116.725)
  Top Layer w2: F2.2 7.652,-87.82 v2(7.652,-91.49) ; v2(146.935,-91.525) v2(146.935,-71.225) ; v1(170.835,-36.175) v2(170.835,-26.825) ; C18.2 170.835,-39.045 173.635,-41.845 v2(173.635,-71.225)
  Bottom Layer w0.6: v5(26.635,-116.725) v5(38.635,-116.725)
  Bottom Layer w2: v2(7.652,-91.49) 7.687,-91.525 v2(26.635,-91.525) v2(146.935,-91.525) ; v2(146.935,-71.225) v2(173.635,-71.225) ; P11.1 v1(158.965,-26.81) 170.82,-26.81 v2(170.835,-26.825) v1(165.335,-26.825) ; P12.1 pad.1@170.763,-35.353
  other v1: 170.835,-34.675 165.335,-28.041 160.465,-26.81 165.351,-25.61
A_GND: C1.2 C2.2 C3.1 C4.1 C5.2 C6.2 C7.2 C8.2 C9.1 C10.1 C11.2 C12.1 C13.2 C14.2 C15.1 C16.1 C17.1 C18.1 C19.2 C20.2 C21.2 C22.2 C23.1 C24.1 C25.2 C26.1 C27.2 C28.1 C29.2 C30.2 C31.1 C32.1 C33.2 C34.1 C35.2 C36.1 D1.2 D2.2 De0.0 De0.26 De10.0 De10.10 De10.22 De10.40 J1.2 J1.3 MH1.1 MH2.1 MH3.1 MH4.1 MH5.1 MH6.1 MH7.1 MH8.1 MH9.1 P1.2 P2.2 P3.2 P4.2 P5.3 P6.2 P7.2 P9.2 P11.11 P11.12 P12.11 P12.12 P13.5 P14.5 P15.5 P16.5 pad.1@134.195,-23 pad.1@134.235,-40.575 pad.1@136.515,-23 pad.1@144.355,-23 pad.1@146.675,-23 pad.1@159.715,-24.16 pad.1@162.397,-43.083 pad.1@162.397,-45.403 pad.1@162.397,-53.243 pad.1@162.397,-55.563 pad.1@173.485,-35.425 pad.2@47.6,-18.75 pad.2@47.6,-40.25 pad.2@72.015,-58.575 pad.2@76.475,-43.05 pad.2@139.335,20.5 pad.2@139.735,-43.475 pad.2@141.965,-9.665 pad.2@145.535,17.925 pad.2@149.062,-33.003 pad.2@149.062,-50.968 pad.2@153.507,-36.753 pad.2@153.507,-54.718 pad.2@159.549,-9.665 pad.2@165.335,-21.575 pad.2@171.287,-45.048 pad.2@-0.603,-66.809 R4.1 S3.2 S4.1 T1.2 T1.4 T2.2 T2.4 T3.2 | length 24.8
  Top Layer w1: C36.1 C35.2 ; C34.1 C33.2
  Top Layer w2: -7.79,-62.7 -7.79,-59.1 ; 174.585,-21.05 174.585,-16.8
  Bottom Layer w1: P9.2 130.789,-40.575 v1(133.485,-40.575) v1(134.985,-40.575) ; pad.2@139.335,20.525 pad.2@139.37,20.49
  Bottom Layer w2: -7.79,-62.7 -7.79,-59.1 ; 174.585,-21.05 174.585,-16.8
  other v1: 36.88,-124.711 5.015,-72.075 6.515,-72.075 -0.603,-68.025 -0.603,-66.809 -0.587,-65.594 70.799,-58.559 72.015,-58.575 73.23,-58.575 82.935,-57.075 161.647,-55.563 163.147,-55.563 153.507,-54.718 161.647,-53.243 163.147,-53.243 149.062,-52.183 149.062,-50.968 44.95,-50.75 149.078,-49.752 73.875,-49.642 44.95,-49.25 73.875,-48.142 171.287,-46.263 161.647,-45.403 163.147,-45.403 171.287,-45.048 139.735,-44.69 171.303,-43.832 139.735,-43.475 77.69,-43.066 161.647,-43.083 163.147,-43.083 75.26,-43.05 76.475,-43.05 139.751,-42.26 47.584,-41.466 47.6,-40.25 47.6,-39.035 -6.535,-37.075 1.865,-37.075 153.507,-36.753 173.485,-36.175 173.485,-34.675 149.062,-34.218 149.062,-33.003 149.078,-31.787 44.95,-29.25 44.95,-27.75 -6.535,-25.575 1.865,-25.575 158.965,-24.16 160.465,-24.16 134.195,-23.75 136.515,-23.75 144.355,-23.75 146.675,-23.75 165.335,-22.79 134.195,-22.25 136.515,-22.25 144.355,-22.25 146.675,-22.25 165.335,-21.575 165.351,-20.359 47.584,-19.965 47.6,-18.75 47.6,-17.534 138.215,-14.11 155.799,-14.11 141.965,-9.665 143.18,-9.665 159.549,-9.665 160.765,-9.665 140.749,-9.649 158.334,-9.649 144.785,17.925 146.285,17.925 139.319,19.285 139.335,20.5 139.335,21.715 34.356,33.42
B_12V: C1.1 C3.2 F1.2 pad.1@7.639,-80.314 pad.2@-0.603,-72.059 T1.1 T2.1 | length 69.2
  Top Layer w2: v2(-6.572,-81.457) v2(-6.572,-71.424) ; v2(28.235,-72.925) 28.235,-65.855 T2.1
  Bottom Layer w2: v2(-6.572,-81.457) -4.032,-83.997 2.648,-83.997 6.331,-80.314 pad.1@7.639,-80.314 ; v2(-6.572,-71.424) -6.482,-71.334 -0.603,-71.334 v1(-0.603,-72.059) v1(-0.603,-73.275) 1.755,-73.275 3.206,-74.725 v1(6.515,-74.725) 9.515,-74.725 9.685,-74.895 9.885,-74.895 10.155,-75.165 T1.1@10.155,-75.365 ; T1.1@12.695,-72.825 12.865,-72.825 12.965,-72.925 v2(28.235,-72.925)
  other v1: 5.015,-74.725 -0.587,-70.844
  other v2: 5.493,-81.076 7.144,-81.076 8.795,-81.076 5.493,-79.552 7.144,-79.552 8.795,-79.552
D_3P3: C11.1 C12.2 P6.1 T3.3 | length 16
  Top Layer w0.6: T3.3 76.305,-57.95 76.93,-58.575 C11.1 C12.2 P6.1
D_5V: C2.1 C4.2 C5.1 C6.1 C13.1 C14.1 C15.2 C16.2 C21.1 C22.1 C23.2 C24.2 C29.1 C30.1 C31.2 C32.2 P7.1 P9.1 P13.2 P14.2 P15.2 P16.2 pad.1@134.235,-37.925 pad.1@139.735,-38.225 pad.1@149.062,-56.218 pad.2@139.335,15.25 pad.2@145.535,15.275 pad.2@149.062,-38.253 R2.2 T1.3 T2.3 T3.1 U1.5 U1.6 U1.7 U1.8 | length 456.5
  Top Layer w0.6: v1(0.595,1.125) 0.595,2.435 1.865,3.705 ; v1(1.865,1.125) 1.865,3.705 ; v1(3.135,1.125) 3.135,4.975 ; v1(4.405,1.125) 4.405,5.075 ; v1(5.935,5.225) 5.885,5.275 4.405,5.275 3.435,5.275 3.135,4.975 ; 1.865,3.705 3.135,4.975
  Top Layer w1: v2@71.135,-4.625 v1(71.135,15.275) ; T3.1 C4.2 C2.1 v2@71.225,-4.735 ; P14.2 C24.2 C22.1 136.735,-9.645 v2(136.735,-4.125) ; v1(144.419,-38.253) 144.435,-38.237 v1(144.435,-30.225) ; v1(145.335,-56.225) v1(145.335,-45.225) ; v1(149.035,-45.225) 149.062,-45.198 v1(149.062,-38.253) v1(149.062,-39.468) ; P7.1 151.9,8.785 v2(151.9,15.24) ; v1(151.935,4.275) P7.1@151.935,8.68 ; v1(154.135,4.275) 154.135,-9.501 C21.1 C23.2 P13.2 ; v1(162.935,-30.225) v1(162.935,-4.125)
  Top Layer w2: v2(19.9,-4.8) v2@19.9,5.14 ; C5.1 25.137,-4.827 28.265,-7.955 T2.3 ; v2@71.225,-4.735 v2(71.235,-4.725)
  Bottom Layer w1: C6.1@42.69,-4.728 v2@71.232,-4.728 ; v1(71.135,15.275) 139.335,15.275 139.37,15.24 v2(151.9,15.24) ; P9.1 139.403,-37.893 v1(139.735,-38.225) 139.749,-38.225 139.777,-38.253 v1(144.419,-38.253) v1(149.062,-38.253) ; v2(136.735,-4.125) v2(154.135,-4.125) v1(162.935,-4.125) ; v1(144.435,-30.225) v1(162.935,-30.225) ; v1(145.335,-56.225) pad.1@149.055,-56.225 ; v1(145.335,-45.225) v1(149.035,-45.225) ; pad.2@149.055,-38.26 v1(149.062,-38.253) ; v1(149.062,-56.218) v1(153.507,-56.218) P16.2 ; P7.1@151.835,8.78 P7.1 ; v1(151.935,4.275) v1(154.135,4.275) ; P15.2 v1(153.507,-38.253) v1(149.062,-38.253)
  Bottom Layer w2: v1@5.985,5.175 v2(19.935,5.175) ; T1.3@12.695,-19.485 12.795,-19.585 25.455,-19.585 28.031,-17.009 28.031,-14.759 T2.3 ; v2(19.9,-4.8) 19.905,-4.805 24.581,-4.805 24.603,-4.827 C5.1 25.196,-4.767 42.396,-4.767 C6.1 ; v2@71.232,-4.728 v2(71.235,-4.725)
  other v1: 149.062,-57.433 149.078,-55.002 139.735,-39.441 133.485,-37.925 134.985,-37.925 149.078,-37.037 139.751,-37.01 139.319,14.034 139.335,15.25 144.785,15.275 146.285,15.275 139.335,16.465
Drive_EN1: De10.20 P7.7 | length 44.9
  Top Layer w0.254: v1(132.935,-11.425) v1(132.935,2.675) ; P7.7 136.63,8.745 136.63,2.68 v1(136.635,2.675)
  Bottom Layer w0.254: De10.20 132.703,-11.393 132.735,-11.425 v1(132.935,-11.425) ; v1(132.935,2.675) v1(136.635,2.675)
Drive_EN2: De10.42 P9.7 | length 32.7
  Top Layer w0.254: v1(124.635,-53.225) v1(124.635,-39.325)
  Bottom Layer w0.254: De10.42 124.627,-39.333 v1(124.635,-39.325) ; v1(124.635,-53.225) 124.681,-53.179 130.601,-53.179 P9.7
FPGA_Power: F4.1 U2.1 | length 27.7
  Top Layer w0.6: U2.1 -5.275,-24.125 -4.4,-25 v2(-4.4,-35) ; v2(0.4,-35) 0.4,-43.372 F4.1
  Bottom Layer w0.6: v2(-4.4,-35) v2(0.4,-35)
IMU_SCL: De10.17 P6.3 | length 74.8
  Top Layer w0.254: P6.3 88.025,-62.315 88.025,-8.835 v1(88.035,-8.825)
  Bottom Layer w0.254: v1(88.035,-8.825) 88.049,-8.839 109.35,-8.839 De10.17
IMU_SDA: De10.19 P6.4 | length 69.8
  Top Layer w0.254: v1(90.535,-11.425) 90.545,-11.435 90.545,-62.315 P6.4
  Bottom Layer w0.254: v1(90.535,-11.425) 90.551,-11.409 109.348,-11.409 De10.19
MA1: C25.1 P11.3 P11.4 P13.1 pad.1@149.325,-23 | length 17.6
  Top Layer w2: P11.3 v1(149.325,-23.75) C25.1 ; v2(156.735,-23.025) 156.749,-23.011 P13.1
  Bottom Layer w2: pad.1@149.325,-23 149.35,-23.025 v2(156.735,-23.025)
  other v1: 149.325,-22.25
MA2: C26.2 P11.5 P11.6 P13.6 | length 11.3
  Top Layer w2: P11.6 C26.2 141.705,-19.444 P13.6
MA_DIR: De10.12 P7.3 | length 44.9
  Top Layer w0.254: P7.3 146.806,8.729 146.806,-1.212 v1(146.827,-1.233)
  Bottom Layer w0.254: De10.12 v1(146.827,-1.233)
MA_I: De0.20 De10.4 P8.2 | length 90.2
  Top Layer w0.254: De0.20 v1(84.835,45.875) ; v1(107.435,36.175) 107.489,36.229 107.489,45.829 v1(107.535,45.875) ; v1(113.835,26.675) v1(113.835,36.175) ; v1(118.035,3.675) v1(118.035,26.675)
  Bottom Layer w0.254: v1(84.835,45.875) v1(107.535,45.875) ; v1(107.435,36.175) v1(113.835,36.175) ; De10.4 111.945,26.686 113.824,26.686 v1(113.835,26.675) v1(118.035,26.675) ; v1(118.035,3.675) 118.038,3.672 126.462,3.672 P8.2
MA_phase1: De10.24 P13.3 | length 47.6
  Top Layer w0.254: v1(120.635,-16.425) v1(120.635,-12.725) ; v1(151.835,-12.725) 151.842,-12.732 151.842,-16.643 P13.3
  Bottom Layer w0.254: De10.24 120.587,-16.473 v1(120.635,-16.425) ; v1(120.635,-12.725) v1(151.835,-12.725)
MA_phase2: De10.26 P13.4 | length 49
  Top Layer w0.254: v1(121.335,-12.125) 121.385,-12.175 121.385,-18.975 v1(121.435,-19.025) ; v1(149.335,-12.125) 149.367,-12.157 149.367,-16.618 P13.4
  Bottom Layer w0.254: De10.26 121.423,-19.013 v1(121.435,-19.025) ; v1(121.335,-12.125) v1(149.335,-12.125)
MA_PWM: De10.14 P7.4 | length 44.9
  Top Layer w0.254: v1(130.635,-3.825) v1(130.635,0.875) ; v1(144.235,0.875) 144.24,0.88 144.24,8.745 P7.4
  Bottom Layer w0.254: De10.14 111.93,-3.799 130.609,-3.799 v1(130.635,-3.825) ; v1(130.635,0.875) v1(144.235,0.875)
MA_V: De0.18 De10.2 P8.1 | length 94.4
  Top Layer w0.254: v1(82.235,46.475) 82.265,46.445 82.265,41.635 De0.18 ; v1(106.935,36.975) v1(106.935,46.475) ; De10.2@111.934,29.238 v1(111.935,36.975) ; v1(117.235,1.175) v1(117.235,29.175)
  Bottom Layer w0.254: v1(82.235,46.475) v1(106.935,46.475) ; v1(106.935,36.975) v1(111.935,36.975) ; De10.2 111.965,29.206 117.204,29.206 v1(117.235,29.175) ; v1(117.235,1.175) 117.28,1.13 P8.1
MB1: C27.1 P11.7 P11.8 P14.1 | length 10.2
  Top Layer w2: P11.7 P14.1
MB2: C28.2 P11.9 P11.10 P14.6 pad.1@131.545,-23 | length 14.9
  Top Layer w2: P14.6 126.915,-22.905 v2(126.935,-22.925) ; P11.10 v1(131.545,-23.75) C28.2 C28.2@131.545,-22.825
  Bottom Layer w2: v2(126.935,-22.925) 126.947,-22.913 pad.1@131.545,-22.913
  other v1: 131.545,-22.25
MB_DIR: De10.16 P7.5 | length 44.9
  Top Layer w0.254: v1(131.335,-6.325) v1(131.335,1.475) ; P7.5 141.72,8.735 141.72,1.49 v1(141.735,1.475)
  Bottom Layer w0.254: De10.16 131.323,-6.313 v1(131.335,-6.325) ; v1(131.335,1.475) v1(141.735,1.475)
MB_I: De0.24 De10.8 P8.4 | length 78.4
  Top Layer w0.254: v1(89.835,44.475) 89.875,44.435 89.875,41.645 De0.24 ; v1(108.735,34.875) v1(108.735,44.475) ; v1(115.035,21.575) v1(115.035,34.875) ; v1(119.435,8.775) v1(119.435,21.575)
  Bottom Layer w0.254: v1(89.835,44.475) v1(108.735,44.475) ; v1(108.735,34.875) v1(115.035,34.875) ; De10.8 111.955,21.596 115.014,21.596 v1(115.035,21.575) v1(119.435,21.575) ; v1(119.435,8.775) 119.448,8.762 126.452,8.762 P8.4
MB_phase1: De10.28 P14.3 | length 27.2
  Top Layer w0.254: v1(124.035,-21.525) v1(124.035,-18.825) ; v1(134.235,-18.825) 134.25,-18.81 134.25,-16.665 P14.3
  Bottom Layer w0.254: De10.28 124.007,-21.553 v1(124.035,-21.525) ; v1(124.035,-18.825) v1(134.235,-18.825)
MB_phase2: De10.30 P14.4 | length 27.4
  Top Layer w0.254: v1(123.135,-24.125) v1(123.135,-19.825) ; P14.4 131.815,-19.805 v1(131.835,-19.825)
  Bottom Layer w0.254: De10.30 111.92,-24.109 123.119,-24.109 v1(123.135,-24.125) ; v1(123.135,-19.825) v1(131.835,-19.825)
MB_PWM: De10.18 P7.6 | length 44.8
  Top Layer w0.254: v1(132.135,-8.825) v1(132.135,2.075) ; v1(139.135,2.075) 139.165,2.105 P7.6
  Bottom Layer w0.254: De10.18 111.918,-8.839 132.121,-8.839 v1(132.135,-8.825) ; v1(132.135,2.075) v1(139.135,2.075)
MB_V: De0.22 De10.6 P8.3 | length 84.2
  Top Layer w0.254: v1(87.335,45.075) 87.355,45.055 87.355,41.625 De0.22 ; v1(108.135,35.575) v1(108.135,45.075) ; v1(114.435,24.175) v1(114.435,35.575) ; v1(118.735,6.175) 118.785,6.225 118.785,24.125 v1(118.835,24.175)
  Bottom Layer w0.254: v1(87.335,45.075) v1(108.135,45.075) ; v1(108.135,35.575) v1(114.435,35.575) ; De10.6 111.943,24.166 114.426,24.166 v1(114.435,24.175) v1(118.835,24.175) ; v1(118.735,6.175) 118.77,6.21 P8.3
MC1: C33.1 P12.3 P12.4 P15.1 pad.1@162.397,-40.433 | length 14.7
  Top Layer w2: v2(162.335,-35.825) 162.335,-40.371 C33.1
  Bottom Layer w2: P15.1 162.313,-35.803 v2(162.335,-35.825) ; pad.1@162.397,-40.433 P12.3
  other v1: 161.585,-40.371 163.085,-40.371
MC2: C34.2 P12.5 P12.6 P15.6 pad.1@162.397,-48.053 | length 10.2
  Bottom Layer w2: P15.6 P12.6
  other v1: 161.647,-48.053 163.147,-48.053
MC_DIR: De10.32 P9.3 | length 35.2
  Top Layer w0.254: v1(116.235,-43.025) v1(116.235,-26.625)
  Bottom Layer w0.254: De10.32 116.227,-26.633 v1(116.235,-26.625) ; v1(116.235,-43.025) 116.261,-42.999 130.621,-42.999 P9.3
MC_I: De0.21 De10.5 P10.2 | length 162.7
  Top Layer w0.254: v1(87.335,32.675) 87.355,32.695 87.355,39.044 De0.21 ; v1(105.335,-56.625) 105.335,-55.825 v1(105.335,24.175) v1(105.335,32.675) ; v1(110.235,-56.625) 110.274,-56.664 v1(110.274,-67.206) ; P10.2 135.731,-63.297 135.731,-67.221 v1(135.735,-67.225)
  Bottom Layer w0.254: v1(87.335,32.675) v1(105.335,32.675) ; v1(105.335,-56.625) v1(110.235,-56.625) ; v1(105.335,24.175) 105.344,24.166 109.385,24.166 De10.5 ; v1(110.274,-67.206) 110.368,-67.206 110.441,-67.279 135.681,-67.279 v1(135.735,-67.225)
MC_phase1: De10.44 P15.3 | length 71.5
  Top Layer w0.254: v1(121.709,-41.899) 121.735,-41.925 v1(121.735,-54.925) ; v1(143.023,-55.006) 143.035,-54.995 v1(143.035,-40.725)
  Bottom Layer w0.254: De10.44 121.683,-41.873 v1(121.709,-41.899) ; v1(121.735,-54.925) 121.816,-55.006 v1(143.023,-55.006) ; v1(143.035,-40.725) 143.057,-40.703 P15.3
MC_phase2: De10.46 P15.4 | length 68
  Top Layer w0.254: v1(121.135,-55.725) v1(121.135,-44.425) ; v1(143.635,-55.625) v1(143.635,-43.125)
  Bottom Layer w0.254: De10.46 121.123,-44.413 v1(121.135,-44.425) ; v1(121.135,-55.725) 121.185,-55.675 143.585,-55.675 v1(143.635,-55.625) ; v1(143.635,-43.125) 143.649,-43.139 156.033,-43.139 P15.4
MC_PWM: De10.34 P9.4 | length 35.6
  Top Layer w0.254: v1(126.535,-45.625) 126.535,-45.531 126.735,-45.331 v1(126.735,-29.125)
  Bottom Layer w0.254: De10.34 111.928,-29.149 126.711,-29.149 v1(126.735,-29.125) ; v1(126.535,-45.625) 126.591,-45.569 130.591,-45.569 P9.4
MC_V: De0.19 De10.3 P10.1 | length 168.4
  Top Layer w0.254: v1(84.835,33.275) De0.19 ; v1(106,-56) 106,26.346 106.235,26.581 v1(106.235,33.275) ; v1(109.5,-56) 109.518,-56.018 109.518,-67.807 v1(109.535,-67.825) ; P10.1 138.301,-63.327 138.301,-67.791 v1(138.335,-67.825)
  Bottom Layer w0.254: v1(84.835,33.275) v1(106.235,33.275) ; v1(106,-56) v1(109.5,-56) ; v1(106.235,26.675) 106.257,26.697 De10.3 ; v1(109.535,-67.825) v1(138.335,-67.825)
MD1: C35.1 P12.7 P12.8 P16.1 pad.1@162.397,-50.593 | length 11.5
  Bottom Layer w2: P16.1 159.222,-50.593 P12.7
  other v1: 161.647,-50.593 163.147,-50.593
MD2: C36.2 P12.9 P12.10 P16.6 pad.1@162.397,-58.213 | length 18.6
  Top Layer w2: v1(162.328,-66.018) C36.2@162.328,-58.282
  Bottom Layer w2: P16.6 v1(162.328,-66.018) ; v1(161.647,-58.213) v1(163.147,-58.213) P12.10
MD_DIR: De10.36 P9.5 | length 35.2
  Top Layer w0.254: v1(125.935,-48.025) v1(125.935,-31.625)
  Bottom Layer w0.254: De10.36 111.948,-31.669 125.891,-31.669 v1(125.935,-31.625) ; v1(125.935,-48.025) 125.949,-48.039 130.633,-48.039 P9.5
MD_I: De0.25 De10.9 P10.4 | length 151.9
  Top Layer w0.254: v1(92.435,31.475) 92.456,31.496 De0.25 ; v1(103.735,-58.025) 103.735,-55.825 v1(103.735,19.075) v1(103.735,31.475) ; v1(111.835,-66.125) v1(111.835,-58.025) ; v1(130.635,-66.125) 130.647,-66.113 P10.4
  Bottom Layer w0.254: v1(92.435,31.475) v1(103.735,31.475) ; v1(103.735,-58.025) v1(111.835,-58.025) ; v1(103.735,19.075) v1(103.735,19.075) 109.393,19.076 De10.9 ; v1(111.835,-66.125) v1(130.635,-66.125)
MD_phase1: De10.48 P16.3 | length 55.9
  Top Layer w0.254: v1(123.535,-58.725) v1(123.535,-47.025)
  Bottom Layer w0.254: De10.48 111.94,-46.989 123.499,-46.989 v1(123.535,-47.025) ; v1(123.535,-58.725) 123.564,-58.696 156.019,-58.696 P16.3
MD_phase2: De10.50 P16.4 | length 55.7
  Top Layer w0.254: v1(122.835,-61.025) v1(122.835,-49.525)
  Bottom Layer w0.254: De10.50 111.92,-49.509 122.819,-49.509 v1(122.835,-49.525) ; v1(122.835,-61.025) 122.881,-61.071 156.001,-61.071 P16.4
MD_PWM: De10.38 P9.6 | length 35.2
  Top Layer w0.254: v1(125.235,-50.625) 125.281,-50.579 125.281,-47.796 125.281,-34.279 v1(125.307,-34.253)
  Bottom Layer w0.254: De10.38 v1(125.307,-34.253) ; v1(125.235,-50.625) 125.251,-50.609 130.631,-50.609 P9.6
MD_V: De0.23 De10.7 P10.3 | length 157.3
  Top Layer w0.254: De0.23 89.925,39.055 89.925,32.085 v1(89.935,32.075) ; v1(104.535,-57.425) 104.535,-55.825 v1(104.535,21.575) v1(104.535,32.075) ; v1(111.035,-66.725) v1(111.035,-57.425) ; v1(133.135,-66.625) 133.161,-66.599 133.161,-63.319 P10.3
  Bottom Layer w0.254: v1(89.935,32.075) v1(104.535,32.075) ; v1(104.535,-57.425) v1(111.035,-57.425) ; v1(104.535,21.575) 104.577,21.617 De10.7 ; v1(111.035,-66.725) 111.081,-66.679 133.081,-66.679 v1(133.135,-66.625)
NetC7_1: C7.1 C9.2 F4.2 P4.1 pad.1@0.915,-50.263 pad.2@47.6,-24 | length 83.4
  Top Layer w2: v2(37.6,-50.5) v2(37.6,-24.5) ; P4.1 C9.2 v1(47.6,-24)
  Bottom Layer w2: pad.1@1.1,-50.077 0.915,-50.263 1.152,-50.5 1.419,-50.5 v2(1.677,-50.758) ; pad.1@1.677,-50.5 v2(37.6,-50.5) ; v2(37.6,-24.5) 47.1,-24.5 v1(47.6,-24)
  other v1: 47.584,-25.215 47.6,-22.785
  other v2: 0.153,-52.409 1.677,-52.409 0.153,-50.758 0.153,-49.107 1.677,-49.107
NetC8_1: C8.1 C10.2 F3.2 P3.1 pad.2@47.6,-45.5 | length 83
  Top Layer w2: F3.2 -5.135,-57.965 v2(-5.117,-57.983) ; v2(40.1,-58) v2(40.1,-45.5) ; P3.1 C10.2 v1(47.6,-45.5)
  Bottom Layer w2: v2(-5.117,-57.983) -5.1,-58 v2(40.1,-58) ; v2(40.1,-45.5) v1(47.6,-45.5)
  other v1: 47.584,-46.715 47.6,-44.285
NetD1_1: D1.1 R1.1 | length 1.5
  Top Layer w0.6: D1.1 35.855,-123.615 36.845,-122.625 R1.1
NetD2_1: D2.1 R3.1 | length 1.8
  Top Layer w0.6: D2.1 33.295,34.516 34.497,35.718 R3.1
NetF1_1: F1.1 J1.1 P1.1 P2.1 pad.1@14.015,-80.314 S1.1 | length 58.6
  Top Layer w2: J1.1 34.765,-112.575 39.402,-107.938 39.402,-101.523 35.318,-97.439 P1.1 34.83,-97.376 v6(34.83,-80.187)
  Bottom Layer w2: pad.1@14.078,-80.251 21.178,-80.251 21.241,-80.187 v6(34.83,-80.187)
  other v2: 12.859,-81.076 14.51,-81.076 16.161,-81.076 12.859,-79.552 14.51,-79.552 16.161,-79.552
NetF2_1: F2.1 pad.1@14.015,-87.807 S1.2 | length 12.6
  Bottom Layer w2: pad.1@14.015,-87.807 21.241,-87.807 S1.2@26.575,-87.807
  other v2: 12.859,-88.569 14.51,-88.569 16.161,-88.569 12.859,-87.045 14.51,-87.045 16.161,-87.045
NetR2_1: R2.1 S2.2 | length 15.9
  Top Layer w0.6: v1(5.935,2.125) R2.1 ; S2.2 12.205,-5.775 12.205,2.145 v1(12.22,2.16)
  Bottom Layer w0.6: v1(5.935,2.125) 5.97,2.16 v1(12.22,2.16)
NetR3_2: R3.2 R4.2 U1.3 | length 78.4
  Top Layer w0.6: U1.3 v2(3.135,-1.825) ; v2@35.558,26.398 35.558,34.41 35.576,34.428 35.558,34.445 R3.2
  Top Layer w2: v2(6.935,-1.714) 6.935,0.875 8.002,1.942 8.002,8.942 v2(8.035,8.975) ; v2(35.535,8.875) v2(35.535,26.375)
  Bottom Layer w0.6: v2(3.135,-1.825) v2@3.246,-1.714
  Bottom Layer w2: v2@3.246,-1.714 v2(6.935,-1.714) ; v2(8.035,8.975) 35.435,8.975 v2(35.535,8.875) ; v2(35.535,26.375) 35.735,26.175 R4.2
NetR5_1: pad.1@1.865,-30.075 pad.1@-6.535,-30.075 R5.1 S3.1 U2.2 | length 25.6
  Top Layer w0.6: R5.1 -6.9,-20.6 -8,-21.7 -8,-28.71 -6.635,-30.075 v1(-6.535,-30.075) ; U2.2 -4.005,-22.995 v1(-4,-23)
  Bottom Layer w0.6: v1(-8,-23) v1(-4,-23) ; pad.1@-6.56,-30.1 v1(-6.535,-30.075) v1(1.865,-30.075)
NetR5_2: R5.2 R6.2 U1.1 U2.5 U2.6 U2.7 U2.8 | length 37.6
  Top Layer w0.6: v1(-6.9,-18.05) -6.9,-16.426 -6.549,-16.075 v1(-5.275,-16.075) ; v1(-5.3,-4.3) -5.3,-10.9 ; U2.8@-5.275,-16.05 -5.275,-15.65 -5.3,-15.625 -5.3,-10.9 ; v1(-4.005,-16.075) v1@-4.005,-12.195 ; v1(-2.735,-16.075) -2.735,-13.465 ; v1(0.1,-18.05) 0.1,-16.426 -0.251,-16.075 v1(-1.465,-16.075) -1.465,-14.735 -2.735,-13.465 ; -5.3,-10.9 v1@-4.005,-12.195 ; v1@-4.005,-12.195 -2.735,-13.465
  Bottom Layer w0.6: v1(-5.3,-4.3) -5.275,-4.325 v1(0.595,-4.325)
  other v1: -5.175,-14.655 -2.635,-14.655 -0.095,-14.655 -6.445,-12.115 -3.905,-12.115 -5.175,-9.575 -6.445,-7.035 -3.905,-7.035 -2.635,-4.495
NetR6_1: pad.1@1.865,-32.575 pad.1@-6.535,-32.575 R6.1 S4.2 U2.4 | length 29.1
  Top Layer w0.6: v1(-1.465,-23.365) U2.4 -0.251,-21.525 0.1,-21.174 R6.1 ; S4.2@1.965,-32.575 v1(1.865,-32.575) 1.89,-32.6 3.049,-32.6 3.4,-32.249 3.4,-23.4 v1(3.365,-23.365)
  Bottom Layer w0.6: v1(-6.535,-32.575) v1(1.865,-32.575) ; v1(-1.465,-23.365) v1(3.365,-23.365)
NetS2_1: S2.1 U1.4 | length 11.8
  Bottom Layer w0.6: v1(4.405,-4.325) 14.515,-4.325 14.866,-4.676 14.866,-5.654 S2.1
NetS2_3: S2.3 U1.2 | length 9.2
  Top Layer w0.6: v1(1.865,-5.665) U1.2
  Bottom Layer w0.6: v1(1.865,-5.665) 9.495,-5.665 S2.3
RPi_Power: F3.1 U2.3 | length 23.4
  Top Layer w0.6: F3.1 -5.135,-42.579 -2.735,-40.179 U2.3
UART_RX: De10.13 P5.1 | length 59.1
  Top Layer w0.254: v1(107.535,-3.825) v1(107.535,13.275) ; v1(128.135,13.275) v1(128.135,23.875)
  Bottom Layer w0.254: v1(107.535,-3.825) 107.587,-3.773 De10.13 ; v1(107.535,13.275) 109.075,13.275 109.202,13.275 109.202,14.521 109.964,14.521 109.964,12.756 110.726,12.756 110.726,14.521 111.488,14.521 111.488,13.125 112.25,13.125 112.25,13.275 114.067,13.275 v1(128.135,13.275) ; v1(128.135,23.875) 130.635,23.875 P5.1
UART_TX: De10.15 P5.2 | length 58.8
  Top Layer w0.254: v1(106.835,-6.425) v1(106.835,12.375) ; v1(127.335,12.375) 127.335,12.275 v1(127.335,21.525)
  Bottom Layer w0.254: v1(106.835,-6.425) 106.891,-6.369 109.308,-6.369 De10.15 ; v1(106.835,12.375) 108.98,12.375 109.107,12.375 109.107,12.387 109.869,12.387 109.869,11.105 110.631,11.105 110.631,12.375 111.393,12.375 111.393,11.545 112.155,11.545 112.155,12.375 114.818,12.375 v1(127.335,12.375) ; v1(127.335,21.525) P5.2
pads on no net: De0.1 De0.2 De0.3 De0.4 De0.5 De0.6 De0.7 De0.8 De0.9 De0.10 De0.11 De0.12 De0.13 De0.14 De0.15 De0.16 De0.17 De10.1 De10.11 De10.21 De10.23 De10.25 De10.27 De10.29 De10.31 De10.33 De10.35 De10.37 De10.39 De10.41 De10.43 De10.45 De10.47 De10.49 P1.3 P6.5 P6.6 P6.7 P6.8 P6.9 P6.10 RPi1.1 S2.4 S3.3 S4.3 T3.4
copper on no net:
  other v3: 25.15,2.793 42.45,2.893 25.15,11.683 42.45,11.783
  other v4: 7.289,-67.205 38.289,-67.205 7.289,-13.205 38.289,-13.205

## Polygon pours and split planes (outlines as drawn)
A_GND on Bottom Layer "A_GND_L02_P020" (solid, remove dead copper, pour order 20): -8.975,50.825 -8.975,-59.99 -8.985,-60 46,-60 46,-67 158,-67 158,-32 120,-32 120,-19 177,-19 177,51
D_5V on Bottom Layer "D_5V_L02_P011" (solid, pour order 11): 6.685,6 2.5,6 0,3.5 0,0 5.01,0 5.01,4.4 6.685,4.4
NetR5_2 on Bottom Layer "NETR5_2_L02_P014" (solid, remove dead copper, pour order 14): 1.2,-18.875 -8.979,-18.875 -8.979,-2.8 1.2,-2.8
A_GND on Bottom Layer "A_GND_L02_P007" (solid, remove dead copper, pour order 7): -8.865,-61.325 -8.865,-136.325 178.135,-136.325 178.135,-19.325 121.135,-19.325 121.135,-30.325 159.135,-30.325 159.135,-68.325 45.135,-68.325 45.135,-61.325
A_GND on Top Layer "A_GND_L01_P019" (solid, remove dead copper, pour order 19): -8.975,50.825 -8.975,-59.99 -8.985,-60 46,-60 46,-67 158,-67 158,-32 120,-32 120,-19 177,-19 177,51
A_GND on Top Layer "A_GND_L01_P006" (solid, remove dead copper, pour order 6): -8.865,-61.325 -8.865,-136.325 178.135,-136.325 178.135,-19.325 121.135,-19.325 121.135,-30.325 159.135,-30.325 159.135,-68.325 45.135,-68.325 45.135,-61.325
D_5V on Top Layer "D_5V_L01_P018" (solid, pour order 18): 6.685,6 2.5,6 0,3.5 0,0 5.01,0 5,4.4 6.685,4.4
NetR5_2 on Top Layer "NETR5_2_L01_P015" (solid, remove dead copper, pour order 15): 1.2,-18.875 -8.979,-18.875 -8.979,-2.8 1.2,-2.8

## Keep-outs
Keep-Out Layer: